# Allegro board CAD2.brd
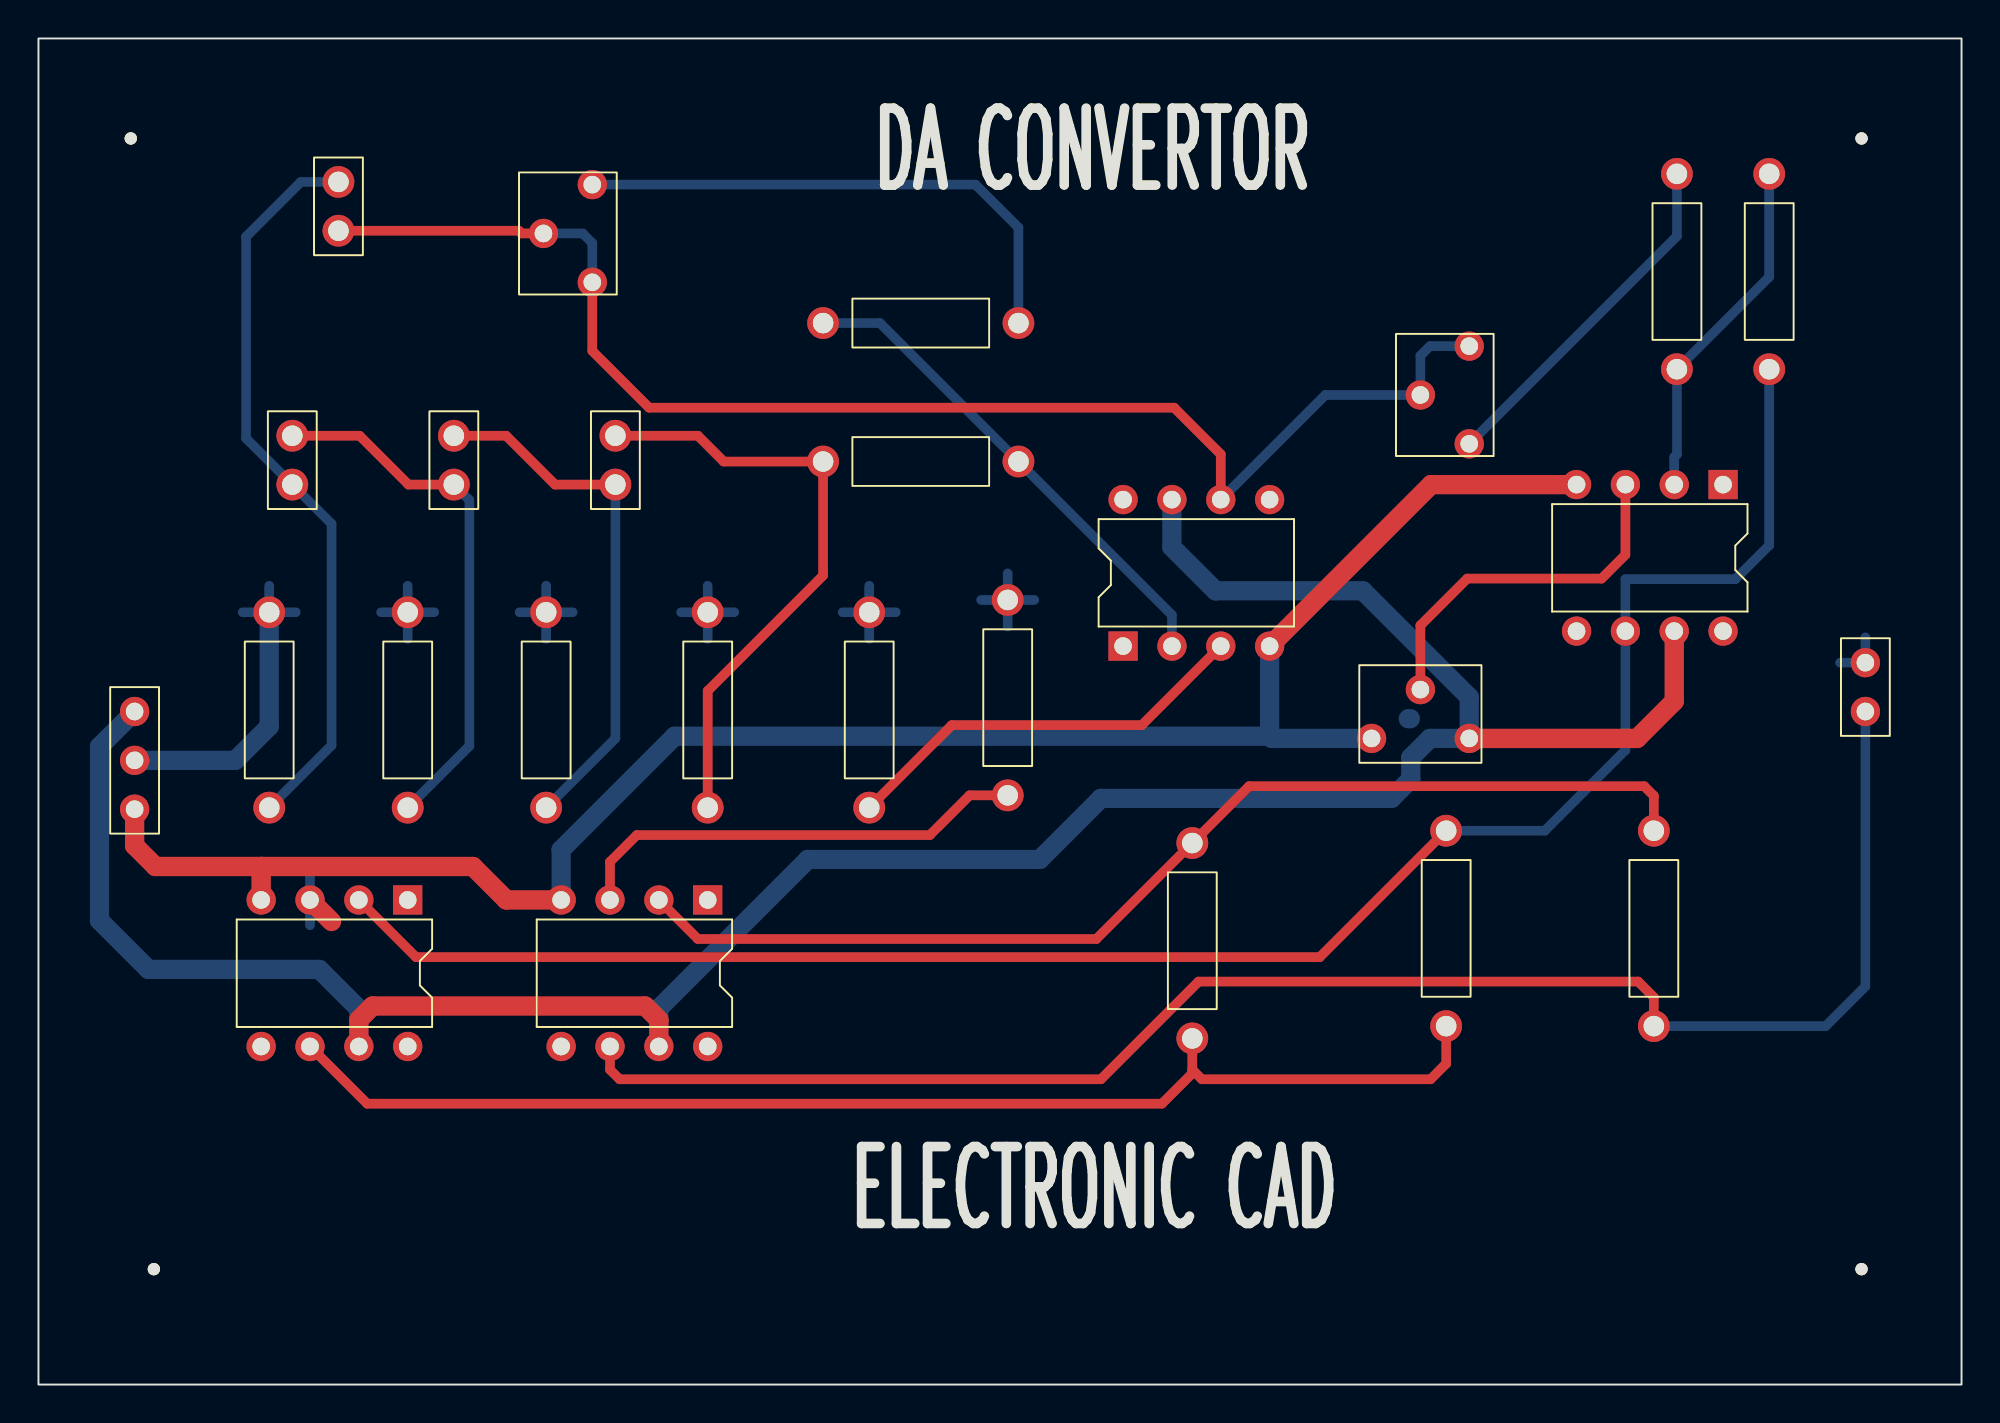
[diagram p0: board, top side]
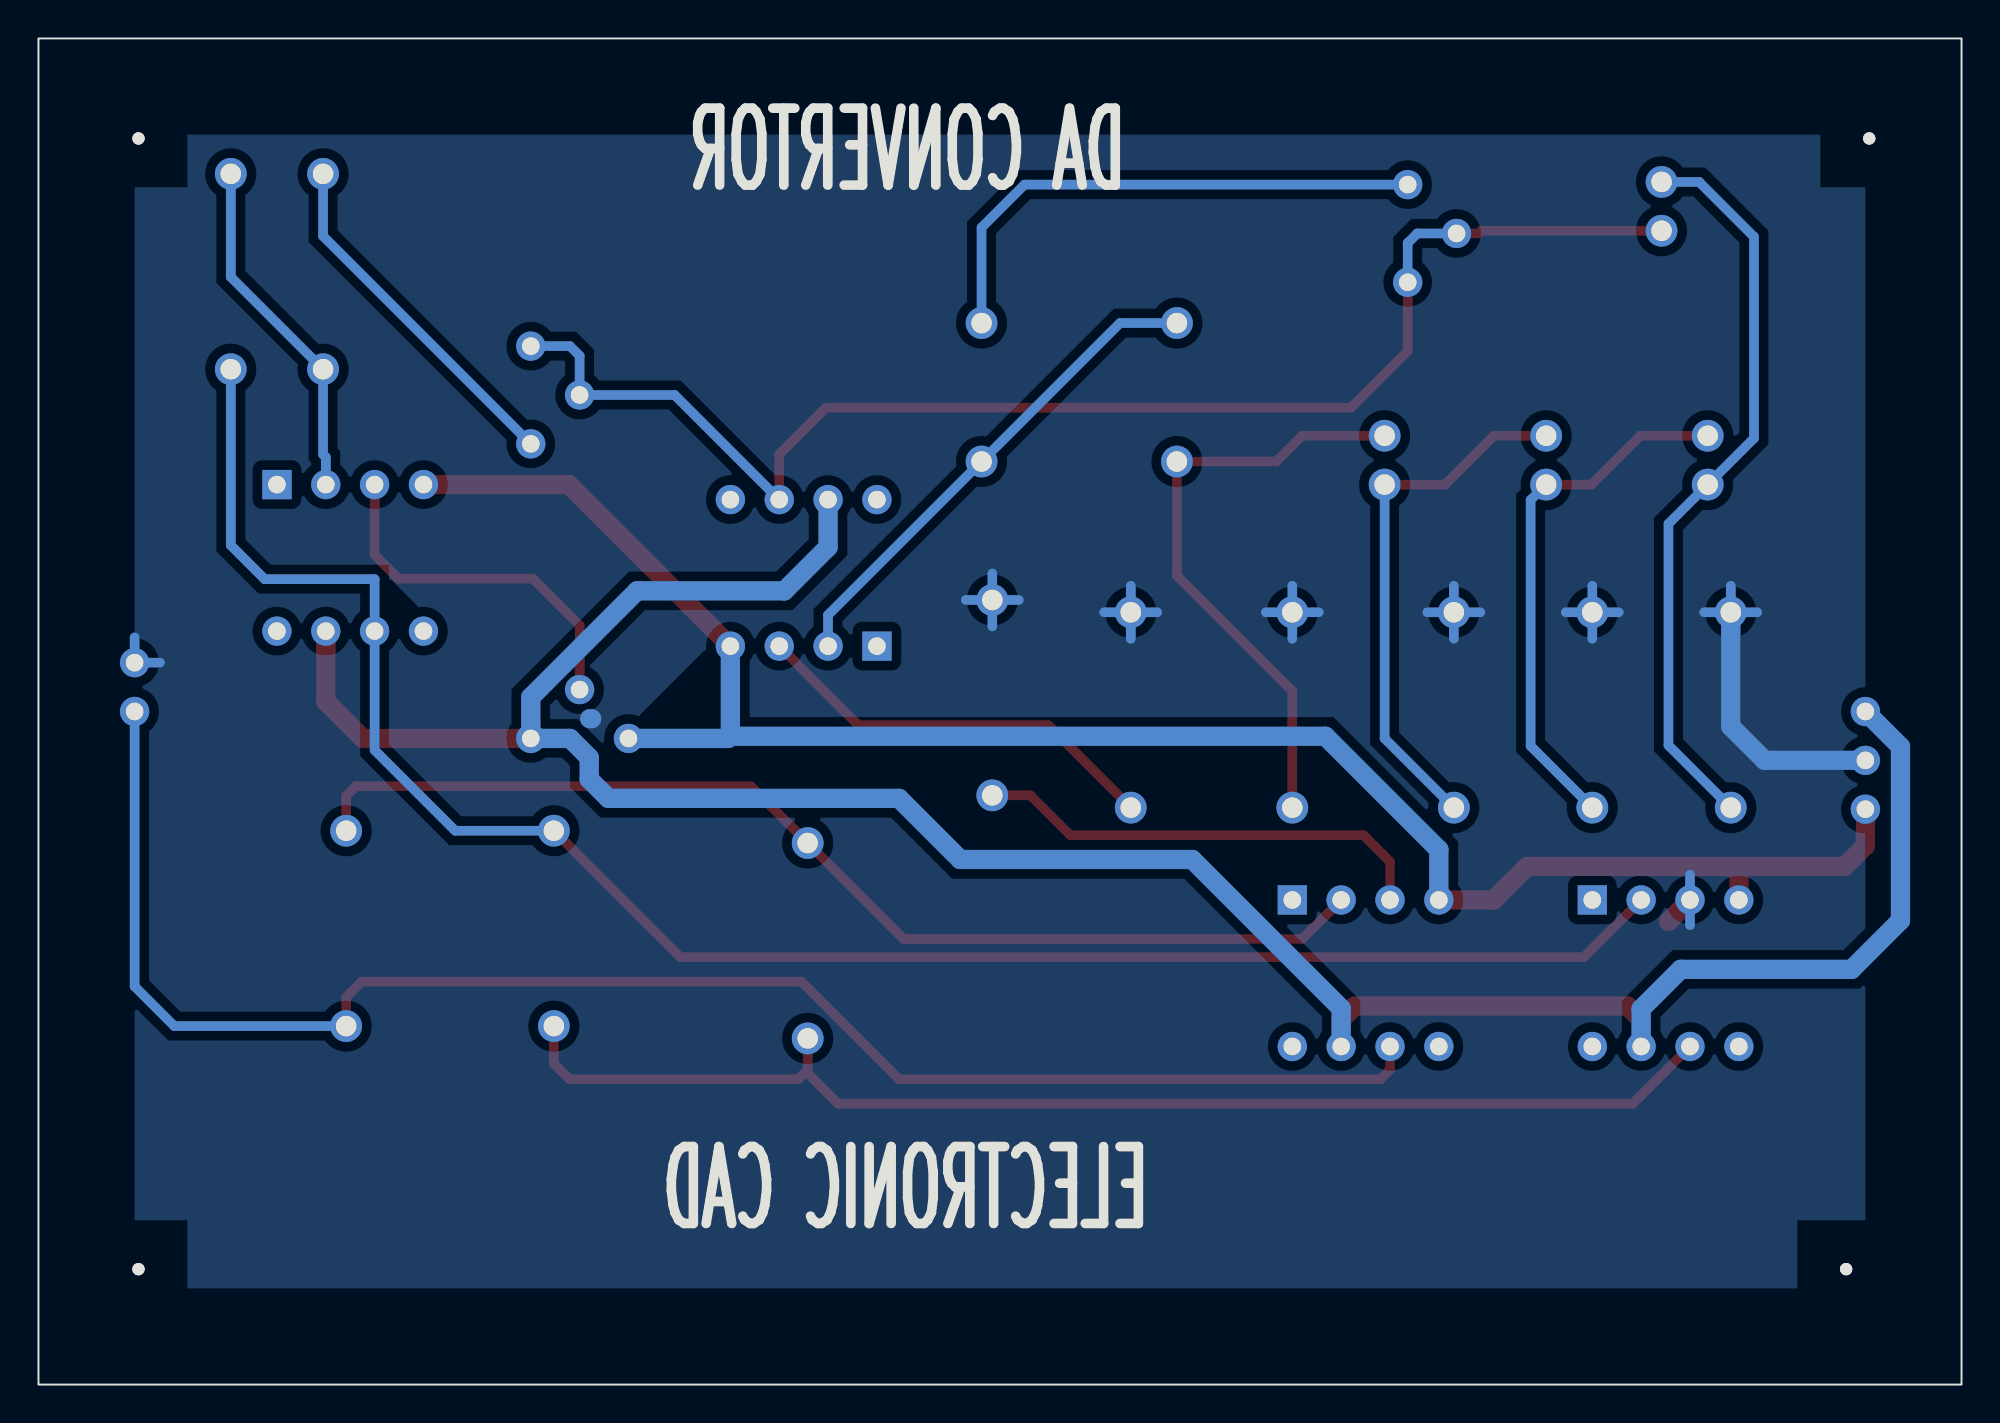
[diagram p1: board, bottom side, seen from below]

Outline 100 x 70 mm; copper layers: TOP, BOTTOM. Coordinates in mm from the lower left corner of the outline.
Outline path: rectangle 0,0 100,70

## Design rules (mm)
constraint set DEFAULT: min track width 0.5

## Placement (name value [footprint] x y rotation side)
C1  0.001uF  [CAPCK05]  15.6 60 0 top
C2  0.001uF  [CAPCK05]  13.2 46.8 0 top
C3  0.001uF  [CAPCK05]  21.6 46.8 0 top
C4  0.001uF  [CAPCK05]  30 46.8 0 top
J1  CON3  [JUMPER3]  5 35 270 top
J2  CON2  [JUMPER2]  95 35 90 top
NOREF  -  [unnamed]  4.8 64.8 0 top
NOREF#2  -  [unnamed]  94.8 64.8 0 top
NOREF#3  -  [#2]  0 70 0 top
NOREF#4  -  [unnamed]  94.8 6 0 top
NOREF#5  -  [unnamed]  6 6 0 top
NOREF#6  -  [#2]  100 0 90 top
R1  10K  [RES400]  90 52.8 0 top
R2  15K  [RES400]  40.8 55.2 270 top
R3  10K  [RES400]  40.8 48 270 top
R4  20K  [RES400]  85.2 52.8 0 top
R5  4.7K  [RES400]  12 30 0 top
R6  4.7K  [RES400]  19.2 30 0 top
R7  4.7K  [RES400]  26.4 30 0 top
R8  4.7K  [RES400]  34.8 30 0 top
R9  1K  [RES400]  43.2 30 0 top
R10  8.2K  [RES400]  73.2 28.8 180 top
R11  10K  [RES400]  84 28.8 180 top
R12  2.2K  [RES400]  60 18 0 top
R13  5.1K  [RES400]  50.4 40.8 180 top
U1  LF356  [DIP8_3]  56.4 38.4 90 top
U2  LF356  [DIP8_3]  87.6 46.8 270 top
U3  LF356  [DIP8_3]  19.2 25.2 270 top
U4  LF356  [DIP8_3]  34.8 25.2 270 top
VR1  470K  [RESADJ]  28.8 62.4 0 top
VR2  100K  [RESADJ]  74.4 54 0 top
VR3  10K  [RESADJ]  74.4 33.6 270 top

## Library data of the parts
C1-C4 = CAP NP: Tolerance: ***; User Part Number: ***
J1 = CON3: User Part Number: ***
J2 = CON2: User Part Number: ***
R1-R13 = R: Tolerance: ***; User Part Number: ***
U1-U4 = LF356_5: Tolerance: ***; User Part Number: ***
VR1-VR3 = POT: Tolerance: ***; User Part Number: ***

## Footprints (pads in the part's own frame, mm; a bottom-side part is the same pattern mirrored in y, then rotated)
CAPCK05
  round 1.651 hole 1.067: 1(0,0) 2(0,2.54)
DIP8_3
  rect 1.524x1.524 hole 0.914: 1(0,0)
  round 1.524 hole 0.914: 2(0,-2.54) 3(0,-5.08) 4(0,-7.62) 5(7.62,-7.62) 6(7.62,-5.08) 7(7.62,-2.54) 8(7.62,0)
JUMPER2
  round 1.524 hole 0.914: 1(0,0) 2(2.54,0)
JUMPER3
  round 1.524 hole 0.914: 1(0,0) 2(2.54,0) 3(5.08,0)
RES400
  round 1.651 hole 1.067: 1(0,0) 2(0,10.16)
RESADJ
  round 1.524 hole 0.914: 1(0,0) 2(-2.54,-2.54) 3(0,-5.08)
unnamed
  round 0.635 hole 3.175 unplated: (0,0)

## Nets
+12V: J1.1 U1.7(V-) U2.7(V-) U3.7(V-) U4.7(V-) VR3.1
-12V: J1.3 U1.4 U2.4 U3.4 U4.4 VR3.3
GND: J1.2 J2.2 R5.2 R6.2 R7.2 R8.2 R9.2 R13.1 U3.3
OUT: J2.1 R11.2 U4.6
SIG: R1.1 R10.1 U2.6 U3.2
N00309: R10.2 R12.1 U3.6
N00774: R11.1 R12.2 U4.2
N00814: R13.2 U4.3
N01256: C1.2 C2.1 R5.1
N01357: C2.2 C3.1 R6.1
N01584: C3.2 C4.1 R7.1
N01650: C4.2 R3.1 R8.1
N01691: C1.1 U1.6 VR1.2(WIPER) VR1.3 VR2.1 VR2.2(WIPER)
N01787: R2.2 VR1.1
N01791: R2.1 R3.2 U1.2
N01914: R9.1 U1.3
N02077: R4.2 VR2.3
N02900: R1.2 R4.1 U2.2
N02904: U2.3 VR3.2(WIPER)

Pads without a net: U1 1 5 8; U2 1 5 8; U3 1 5 8; U4 1 5 8

## Routing (per net, layer and track width the routed paths; a pad name or vN(x,y) marks a point on that pad's centre or on a via; arc(x,y) is an arc through that point)
+12V: length 137
  TOP w1: U4.7 32.26,18.97 31.55,19.68 17.38,19.68 16.66,18.97 U3.7 ; VR3.1 83.13,33.6 85.06,35.53 U2.7
  BOTTOM w1: U3.7 16.66,19.54 14.61,21.59 5.71,21.59 3.17,24.13 3.17,33.17 J1.1 ; U4.7 32.26,19.56 40.01,27.3 52.07,27.3 55.24,30.48 70.36,30.48 71.36,31.48 71.36,32.6 72.36,33.6 VR3.1 74.4,35.74 68.87,41.27 61.21,41.27 58.94,43.55 U1.7
-12V: length 98.4
  TOP w1: 11.58,26.94 U3.4 ; 11.58,26.94 6.08,26.94 5,28.02 J1.3 ; 11.58,26.94 22.59,26.94 24.33,25.2 U4.4 ; U1.4 72.42,46.8 U2.4
  BOTTOM w1: U1.4 64.02,33.71 ; 64.02,33.71 64.13,33.6 VR3.3 ; 64.02,33.71 33.08,33.71 27.18,27.82 U4.4
GND: length 52.3
  TOP w1: U3.3 15.24,24.08
  BOTTOM w0.5: R8.2 34.8,41.54 ; R8.2 36.18,40.16 ; R8.2 33.42,40.16 ; R8.2 34.8,38.78 ; 93.69,37.54 J2.2 95,38.85 ; 26.4,38.78 R7.2 ; R7.2 26.4,41.54 ; R7.2 25.02,40.16 ; R7.2 27.78,40.16 ; R5.2 12,41.54 ; R5.2 13.38,40.16 ; R5.2 10.62,40.16 ; 49.02,40.8 R13.1 ; R13.1 51.78,40.8 ; R13.1 50.4,42.18 ; R13.1 50.4,39.42 ; 14.12,23.89 U3.3 14.12,26.52 ; 41.82,40.16 R9.2 ; R9.2 44.58,40.16 ; R9.2 43.2,41.54 ; R9.2 43.2,38.78 ; 17.82,40.16 R6.2 ; R6.2 19.2,41.54 ; R6.2 20.58,40.16 ; R6.2 19.2,38.78
  BOTTOM w1: R5.2 12,34.23 10.23,32.46 J1.2 ; 71.23,34.62 71.34,34.62
OUT: length 85.8
  TOP w0.5: U4.6 29.72,16.38 30.22,15.88 55.24,15.88 60.33,20.95 83.19,20.95 84,20.14 R11.2
  BOTTOM w0.5: R11.2 92.94,18.64 95,20.7 J2.1
SIG: length 97.8
  TOP w0.5: R10.1 66.62,22.23 19.64,22.23 U3.2
  BOTTOM w0.5: R1.1 90,43.65 88.23,41.88 82.52,41.88 U2.6 82.52,32.99 78.33,28.8 R10.1
N00309: length 65.3
  TOP w0.5: U3.6 17.09,14.61 58.42,14.61 60,16.18 60,16.38 ; 60,16.38 60.5,15.88 72.39,15.88 73.2,16.68 R10.2 ; 60,16.38 R12.1
N00774: length 57.9
  TOP w0.5: R11.1 84,30.61 83.5,31.11 62.95,31.11 R12.2 55.01,23.17 34.29,23.17 U4.2
N00814: length 24.1
  TOP w0.5: U4.3 29.72,27.18 31.11,28.57 46.35,28.57 48.42,30.64 R13.2
N01256: length 38.9
  BOTTOM w0.5: C1.2 13.64,62.54 10.79,59.69 10.79,49.2 C2.1 15.24,44.76 15.24,33.24 R5.1
N01357: length 27.9
  TOP w0.5: C3.1 19.24,46.8 16.7,49.34 C2.2
  BOTTOM w0.5: R6.1 22.41,33.21 22.41,45.99 C3.1
N01584: length 27.7
  TOP w0.5: C3.2 24.32,49.34 26.86,46.8 C4.1
  BOTTOM w0.5: C4.1 30,33.6 R7.1
N01650: length 31.8
  TOP w0.5: C4.2 34.29,49.34 35.63,48 R3.1 40.8,42.07 34.8,36.07 R8.1
N01691: length 73.8
  TOP w0.5: VR1.3 28.8,53.75 31.75,50.8 59.05,50.8 61.48,48.38 U1.6 ; VR1.2 25.12,59.86 24.98,60 C1.1
  BOTTOM w0.5: VR1.3 28.8,59.36 28.3,59.86 VR1.2 ; VR2.1 72.36,54 71.86,53.5 VR2.2 66.92,51.46 U1.6
N01787: length 28.1
  BOTTOM w0.5: VR1.1 48.72,62.4 50.96,60.16 R2.2
N01791: length 26
  BOTTOM w0.5: U1.2 58.94,40.02 R3.2 43.76,55.2 R2.1
N01914: length 21.8
  TOP w0.5: U1.3 57.37,34.29 47.49,34.29 R9.1
N02077: length 18.5
  BOTTOM w0.5: VR2.3 85.2,59.72 R4.2
N02900: length 18.2
  BOTTOM w0.5: U2.2 85.06,48.23 85.2,48.37 R4.1 90,57.6 R1.2
N02904: length 19.2
  TOP w0.5: VR3.2 71.86,39.48 74.29,41.91 81.28,41.91 82.52,43.15 U2.3

## Copper pours and planes (outline as drawn; the poured copper is in the pictures)
GND on BOTTOM: 5,5 5,65 95,65 95,5 ; 3 cut-outs

## Text on the board
Board Geometry/Outline: ELECTRONIC CAD | DA CONVERTOR
COMPVAL_TYPE_TOP: FIGURE | FINISHED_SIZE | 0.914 | 1.067 | 3.175 | DRILL CHART: TOP to BOTTOM | ALL UNITS ARE IN MILLIMETERS | PLATED | NON-PLATED | QTY | 54 | 26 | 4
